# Altium PCB PCB1.PcbDoc
Units mm, origin at the board's own origin, x right, y up, seen from the top; angles counter-clockwise.
Board outline 100.55 x 100 mm, 2 copper layers (Top Layer, Bottom Layer); 36 components, 15 nets, 102 pads, 5 vias.
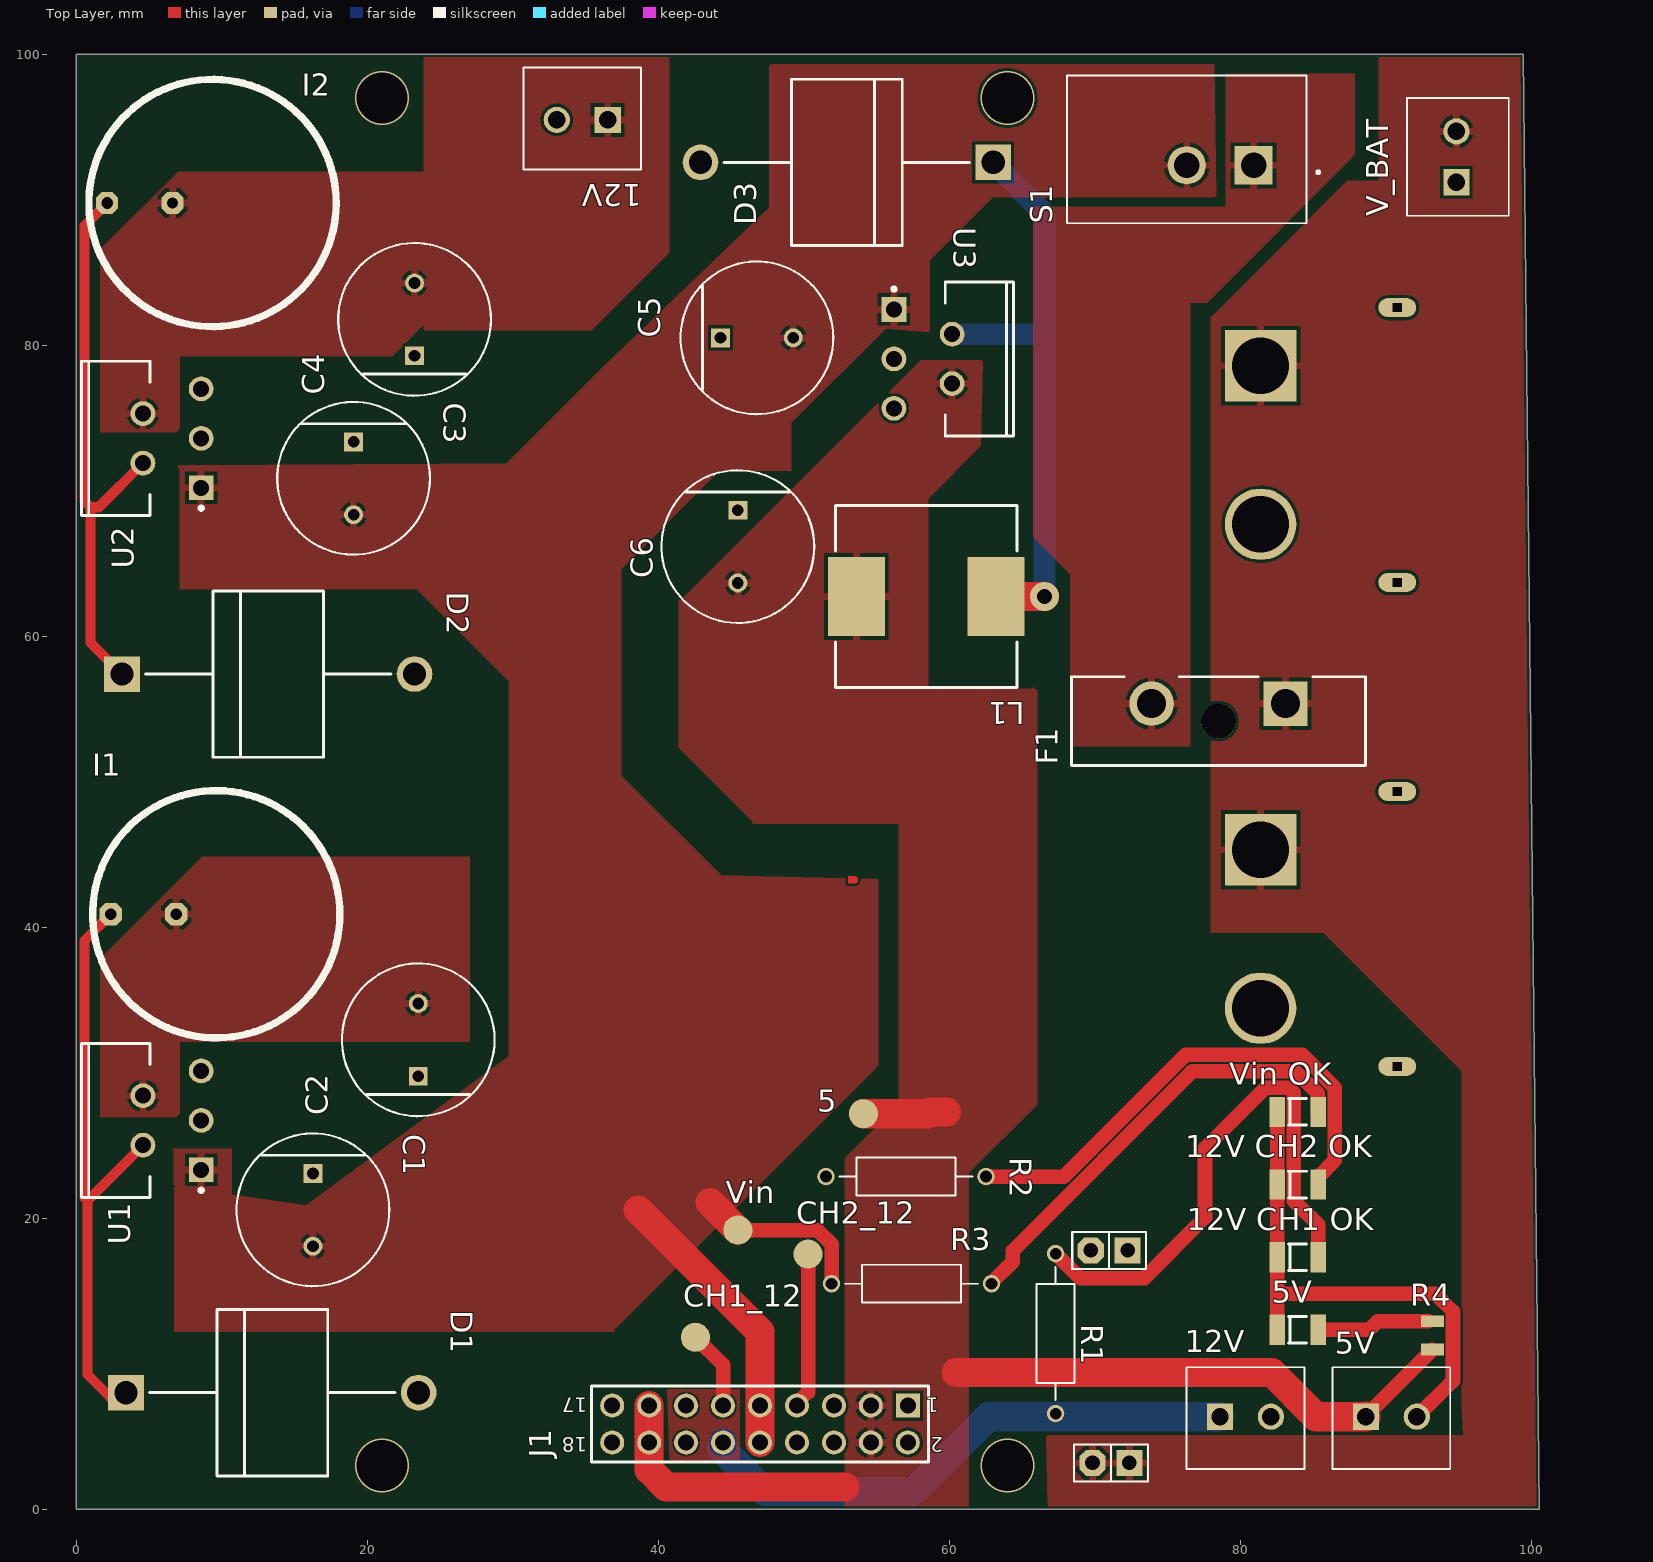
[diagram p0: Top Layer view]
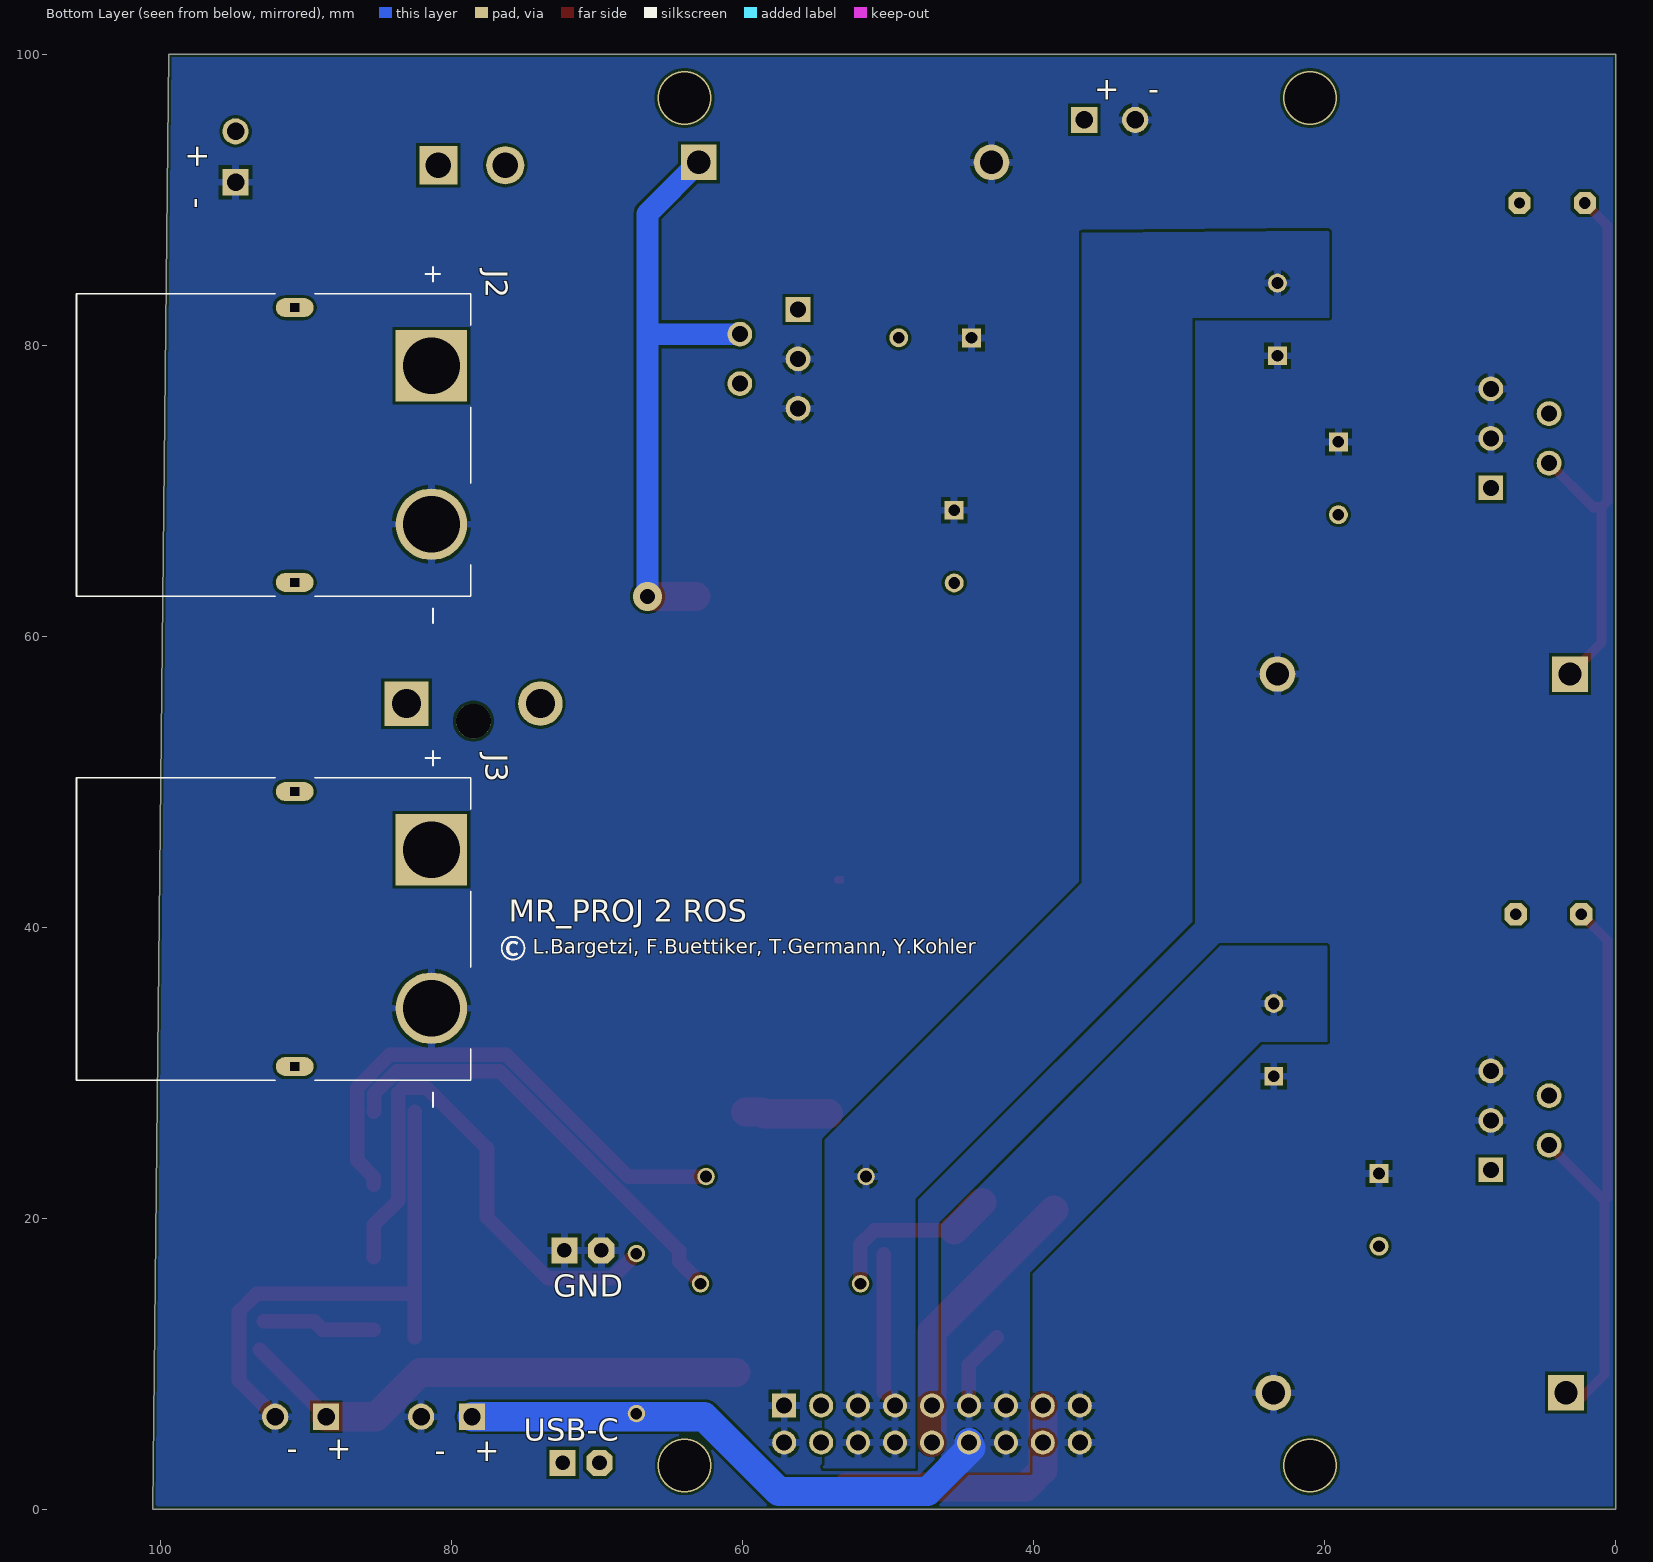
[diagram p1: Bottom Layer view, seen from below]
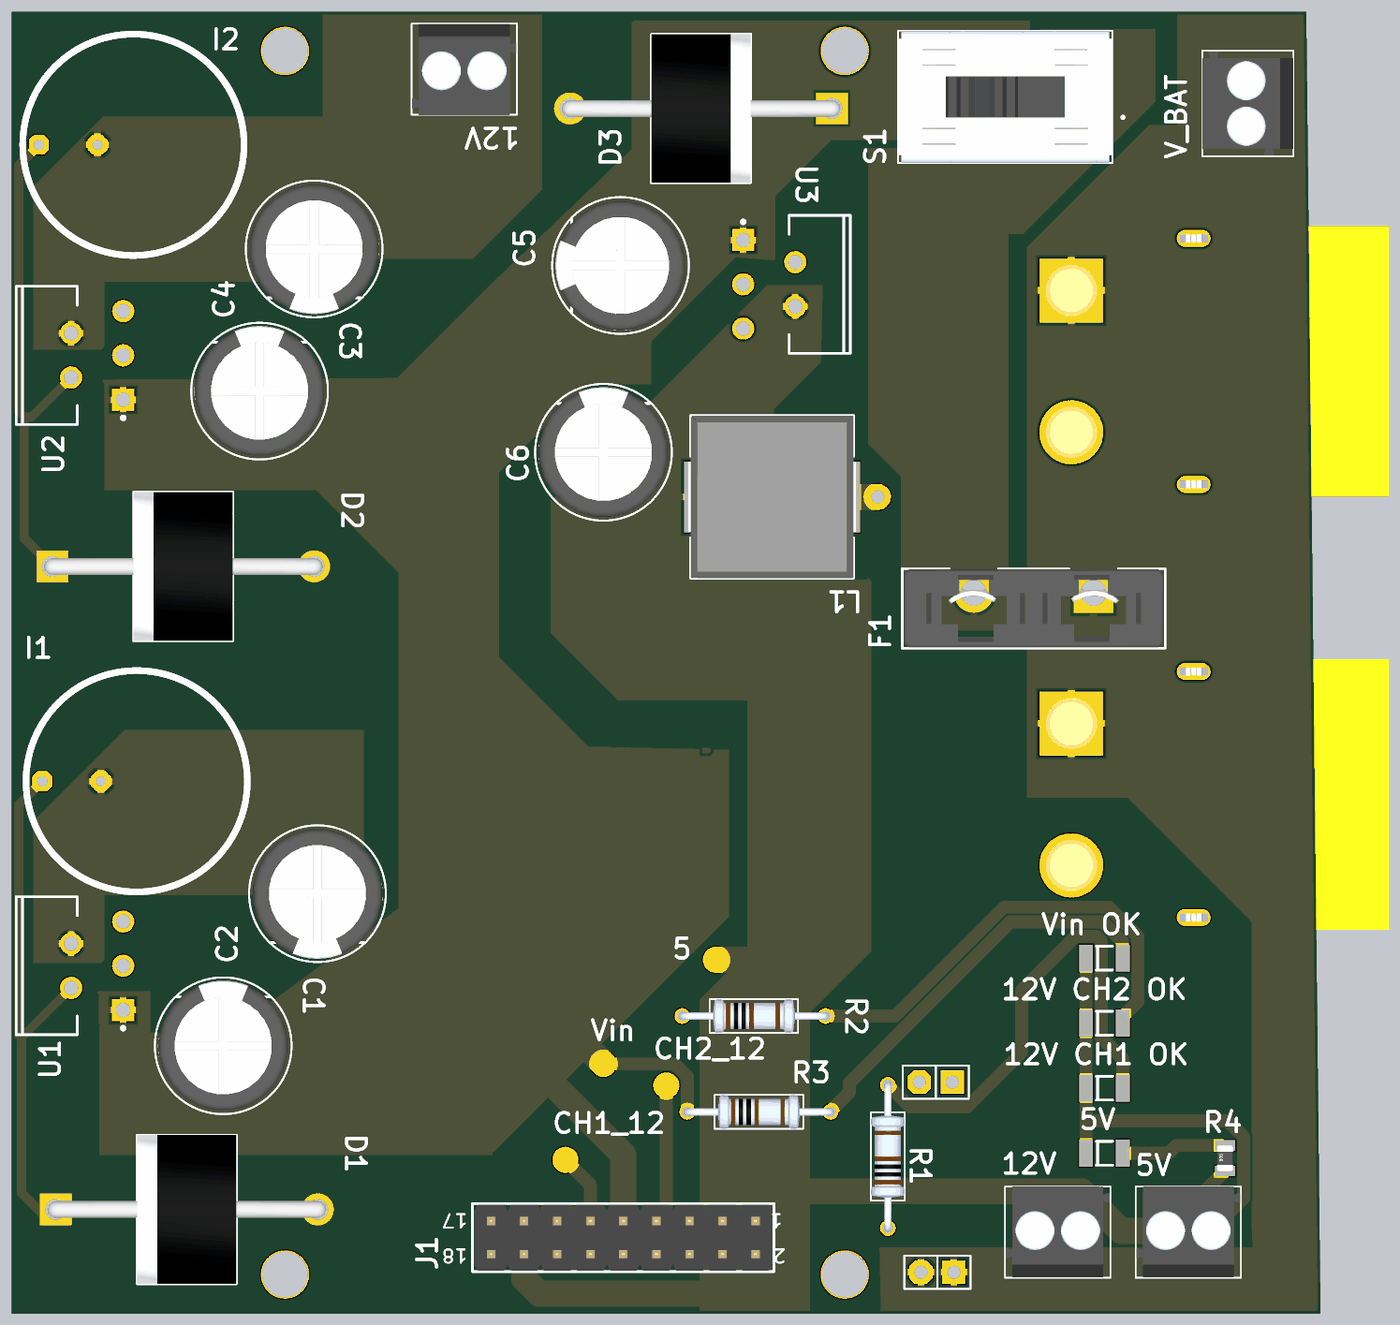
[diagram p2: 3D render of the assembled board from above, using the file's embedded part models]

## Layer stack, top to bottom
Top Solder: solder mask 0.0102, Solder Resist, Dk 3.5
Top Layer: signal copper 0.0356
Dielectric 1: dielectric 0.32, FR-4, Dk 4.8
Bottom Layer: signal copper 0.0356
Bottom Solder: solder mask 0.0102, Solder Resist, Dk 3.5

## Board outline
0,0 0,100 99.455,100 100.546,0 66.548,0

## Design rules (kind name [scope] priority, off if disabled: settings)
BoardOutlineClearance [All] p1: gap=0.2 ignorepadtopadclearanceinfootprint=FALSE except(0.4: Arc-SplitBarrior Arc-SplitContinuation Track-SplitBarrior Track-SplitContinuation SMDPad-SplitBarrior SMDPad-SplitContinuation THPad-SplitBarrior THPad-SplitContinuation Via-SplitBarrior Via-SplitContinuation Fill-SplitBarrior Fill-SplitContinuation Poly-SplitBarrior Poly-SplitContinuation Region-SplitBarrior Region-SplitContinuation Text-SplitBarrior Text-SplitContinuation)
Clearance "Clearance Bottom Layer" [OnLayer('Bottom Layer')] p1: gap=0.2 ignorepadtopadclearanceinfootprint=TRUE except(0.089: Arc-Arc Arc-Track Arc-SMDPad Track-Track Track-SMDPad SMDPad-SMDPad; 0.127: Arc-Via Track-Via SMDPad-Via THPad-Via Via-Via; 0.254: Arc-Text Track-Text SMDPad-Text THPad-Text Via-Text Fill-Text Poly-Text Region-Text Text-Text)
Clearance "Clearance Top Layer" [OnLayer('Top Layer')] p2: gap=0.2 ignorepadtopadclearanceinfootprint=TRUE except(0.089: Arc-Arc Arc-Track Arc-SMDPad Track-Track Track-SMDPad SMDPad-SMDPad; 0.127: Arc-Via Track-Via SMDPad-Via THPad-Via Via-Via; 0.254: Arc-Text Track-Text SMDPad-Text THPad-Text Via-Text Fill-Text Poly-Text Region-Text Text-Text)
Clearance [All] p3: gap=0.2 ignorepadtopadclearanceinfootprint=FALSE except(0.089: Arc-Arc Arc-Track Arc-SMDPad Track-Track Track-SMDPad SMDPad-SMDPad; 0.127: Arc-Via Track-Via SMDPad-Via THPad-Via Via-Via; 0.254: Arc-Text Track-Text SMDPad-Text THPad-Text Via-Text Fill-Text Poly-Text Region-Text Text-Text)
HoleSize [All] p1: absolutevalues=TRUE maxlimit=6.3 minlimit=0.2 maxpercent=80.000 minpercent=20.000
MinimumAnnularRing [All] p1: minimumring=0.076
MinimumSolderMaskSliver [All] p1: minsoldermaskwidth=0.1
PolygonConnect PolygonConnect_1 [All] p1: thpad.connectstyle=Relief thpad.reliefconductorwidth=0.508 thpad.reliefentries=4 thpad.polygonreliefangle="90 Angle" thpad.airgapwidth=0.254 smdpad.connectstyle=Relief smdpad.reliefconductorwidth=0.508 smdpad.reliefentries=4 smdpad.polygonreliefangle="90 Angle" smdpad.airgapwidth=0.254 via.connectstyle=Direct via.reliefconductorwidth=0.508 via.reliefentries=4 via.polygonreliefangle="90 Angle" via.airgapwidth=0.254
RoutingCorners [All] p1: cornerstyle=Round minsetback=2.54 maxsetback=2.54
RoutingVias [All] p1: holewidth=0.5 width=1 viastyle="Through Hole" minholewidth=0.2 minwidth=0.45 maxholewidth=1 maxwidth=2
SilkToSilkClearance [All] p1: silktosilkclearance=0.1
SilkToSolderMaskClearance [IsPad] p1: minsilkscreentomaskgap=0.1 clearancetoexposedcopper=TRUE
SolderMaskExpansion [All] p1: expansion=0.102 istentingtop=FALSE
Width [All] p1: maxlimit=2.54 minlimit=0.089 preferedwidth=0.381
25 further rules are at their usual default settings.

## Classes and differential pairs
component class Sheet1: 5 5V 12V "12V CH2 OK" C1 C2 C3 C4 C5 C6 CH1_12 CH2_12 D1 D2 D3 F1 I1 I2 J1 J2 J3 L1 R1 R2 R3 S1 U1 U2 U3 V_BAT "Vin OK"

## Components (designator, comment, footprint, x,y, rotation, side; value= is the part's Value field where it differs from the comment)
5 "MP" MP_20 54.102,27.178 r90 top
5V "LED GREEN" LED_1206 83.947,12.319 r0 top (schematic designator D7)
5V "2Pin_Female" OSTTE020104 90.396,6.35 r0 top
12V "2Pin_Female" OSTTE020104 34.77,95.504 r180 top
12V "2Pin_Female" OSTTE020104 80.363,6.35 r0 top (schematic designator 1)
"12V CH1 OK" "LED GREEN" LED_1206 83.947,17.314 r0 top (schematic designator D4)
"12V CH2 OK" "LED GREEN" LED_1206 83.947,22.31 r0 top (schematic designator D5)
C1 "EEUFS1H331" FP-RAD-TH-D_10_0_5-L_20_2-MFG 16.256,20.574 r270 top
C2 "EEUFS1H331" FP-RAD-TH-D_10_0_5-L_20_2-MFG 23.495,32.258 r90 top
C3 "EEUFS1H331" FP-RAD-TH-D_10_0_5-L_20_2-MFG 19.05,70.866 r270 top
C4 "EEUFS1H331" FP-RAD-TH-D_10_0_5-L_20_2-MFG 23.241,81.788 r90 top
C5 "EEUFS1H331" FP-RAD-TH-D_10_0_5-L_20_2-MFG 46.776,80.518 r0 top
C6 "EEUFS1H331" FP-RAD-TH-D_10_0_5-L_20_2-MFG 45.466,66.167 r270 top
CH1_12 "MP" MP_20 42.545,11.811 r90 top
CH2_12 "MP" MP_20 50.292,17.526 r90 top
D1 "1N5825" Microsemi_1N5825_0 13.462,8.001 r0 top
D2 "1N5825" Microsemi_1N5825_0 13.183,57.404 r0 top
D3 "1N5825" Microsemi_1N5825_0 52.959,92.583 r180 top
F1 "178.6164.0001" FP-178_6164_0001-MFG 78.514,54.172 r180 top
I1 "68uH" PCBComponent_1 2.358,40.894 r0 top
I2 "68uH" PCBComponent_1 2.104,89.789 r0 top
J1 "61301821121" 61301821121 46.99,5.842 r180 top
J2 "XT90PW-M" AMASS_XT90PW-M 90.805,73.152 r270 bottom
J3 "XT90PW-M" AMASS_XT90PW-M 90.805,39.878 r270 bottom
L1 "47uH_Inductor" INDM120120X100N 58.42,62.738 r180 top
R1 "330ohm Normalo" RESAD1100W55L680D260 67.31,12.065 r90 top
R2 "330ohm Normalo" RESAD1100W55L680D260 57.023,22.86 r0 top
R3 "MF1W±2% 600R PB" RESAD1100W55L680D260 57.404,15.494 r0 top
R4 "R 120R 0805" 0805 93.218,11.938 r90 top value=120R
S1 "Slide Switch" SW_GF_123_0054 76.327,93.472 r180 top
U1 "LM2596T-12/NOPB" NDH0005A 6.572,26.719 r90 top
U2 "LM2596T-12/NOPB" NDH0005A 6.572,73.611 r90 top
U3 "LM2596T-5.0/NOPB" NDH0005A 58.198,79.072 r270 top
V_BAT "2Pin_Female" OSTTE020104 94.869,92.964 r90 top
Vin "MP" MP_20 45.466,19.177 r0 top
"Vin OK" "LED GREEN" LED_1206 83.947,27.305 r0 top (schematic designator D6)

## Footprints (in the part's own frame and the unit in brackets; to place one, negate y for a bottom-side part, rotate by r counter-clockwise, add the part's x,y. Pads: shape width x height; smd on the part's side, far side on the other; paste and mask are expansions set on the pad)
0805 [mil]
  rect 32x62 smd: 1(-38.5,0) 2(38.5,0)
  body extent -39,-25 39,25, height 31
61301821121 [mm] "Pin Header, pitch 2.54 mm, THT, Vertical, dual row, 18p"
  rect 1.65x1.65 hole 1.1: 1(-10.16,-1.27)
  round 1.65 hole 1.1: 2(-10.16,1.27) 3(-7.62,-1.27) 4(-7.62,1.27) 5(-5.08,-1.27) 6(-5.08,1.27) 7(-2.54,-1.27) 8(-2.54,1.27) 9(0,-1.27) 10(0,1.27) 11(2.54,-1.27) 12(2.54,1.27) 13(5.08,-1.27) 14(5.08,1.27) 15(7.62,-1.27) 16(7.62,1.27) 17(10.16,-1.27) 18(10.16,1.27)
  silkscreen extent -11.58,-2.62 11.58,2.62, body extent -11.43,-2.54 11.43,2.54, height 8.59
AMASS_XT90PW-M [mm]
  round 4.916 hole 3.9: N(5.45,9.4)
  rect 4.916x4.916 hole 3.9: P(-5.45,9.4)
  oval 1.3x2.6 hole 0.6 square: S1(-9.45,0) S2(9.45,0)
  silkscreen extent -12.25,-15 12.25,12.1, body extent -10.6,-15 10.6,12.1, height 10.3
FP-178_6164_0001-MFG [mm]
  rect 3.05x3.05 hole 2 paste-1000 mask+0: 1(-4.6,-1.2)
  round 3.05 hole 2 paste-1000 mask+0: 2(4.6,-1.2)
  round 2.4 hole 2.4 unplated paste-1000 mask+0: ""(0,0)
  silkscreen extent -10.1,-3.05 10.1,3.05, body extent -10.2,-3.15 10.2,3.15, height 0.25
FP-RAD-TH-D_10_0_5-L_20_2-MFG [mm]
  rect 1.3x1.3 hole 0.8 paste-1000 mask+0: 1(-2.5,0)
  round 1.3 hole 0.8 paste-1000 mask+0: 2(2.5,0)
  silkscreen extent -5.25,-5.25 5.25,5.25, body extent -5.35,-5.35 5.35,5.35, height 0.25
INDM120120X100N [mm] "Molded Inductor, 2-Leads, Body 12.00x12.00mm, IPC Medium Density"
  rect 3.9x5.45 smd: 1(-4.8,0) 2(4.8,0)
  silkscreen extent -6.25,-6.25 6.25,6.25, body extent -6.47,-6.25 6.47,6.25, height 10
LED_1206 [mil]
  rect 42x82 smd: A(55.5,0) K(-55.5,0)
  silkscreen extent -24,-36 24,36, body extent -62,-32 64,31, height 43
Microsemi_1N5825_0 [mm]
  rect 2.45x2.45 hole 1.6 paste-1000 mask+0: 1(-10.058,0)
  round 2.45 hole 1.6 paste-1000 mask+0: 2(10.058,0)
  silkscreen extent -8.43,-5.71 8.43,5.71, body extent -11.38,-5.81 11.38,5.81, height 0.25
MP_20 [mm]
  round 2 smd paste-1: 1(0,0)
  body extent -0.99,-1 1,1, height 0
NDH0005A [mm] "FM, 5-Leads, Body 10.6x4.7mm, Pitch 1.7mm"
  rect 1.7x1.7 hole 1.1: 1(-3.4,-2)
  round 1.7 hole 1.1: 2(-1.7,2) 3(0,-2) 4(1.7,2) 5(3.4,-2)
  silkscreen extent -5.3,-2.13 5.3,6.23, body extent -5.35,-2.31 5.35,6.28, height 21.1
OSTTE020104 [mm] "2 Pin Schraub-Klemmleiste"
  rect 1.8x1.8 hole 1.2: 1(-1.75,0)
  round 1.8 hole 1.2: 2(1.75,0)
  silkscreen extent -4.05,-3.6 4.05,3.4, body extent -4,-3.57 4,3.43, height 8.4
PCBComponent_1 [mil]
  oct 60x60 hole 31.5: 4(0,0)
  oct 60x60 hole 30: 5(177.17,0)
  silkscreen extent -49,-335 620,335
RESAD1100W55L680D260 [mm]
  round 1.2 hole 0.8: 1(-5.5,0) 2(5.5,0)
  silkscreen extent -4.58,-1.3 4.58,1.3, body extent -5.77,-1.3 5.77,1.3, height 2.6
SW_GF_123_0054 [mm]
  rect 2.625x2.625 hole 1.75: 1(-4.6,1.09)
  round 2.625 hole 1.75: 2(0,1.09)
  silkscreen extent -9.14,-5.08 8.23,5.08, body extent -8.23,-5.08 8.23,5.08, height 14.96

## Part data
5 CH1_12 CH2_12 Vin: library part Measurement_Pad, Part ID=Measurement_Pad
5V "12V CH1 OK" "12V CH2 OK" "Vin OK": library part LED_GREEN_1206, Supplier Part Number 1=67-1357-1-ND, ComponentLink1Description=Datasheet, ComponentLink1URL=https://media.digikey.com/pdf/Data%20Sheets/Lite-On%20PDFs/LTST-C230KGKT.pdf, Part ID=LED_GREEN_1206, Peak Wavelenght=565nm, Price 10pcs=0.226, Supplier 1=Digi-Key
5V 12V 12V V_BAT: library part Terminal_2Pin, Supplier Part Number 1=ED2740-ND, ComponentLink1Description=Datasheet, ComponentLink1URL=https://www.on-shore.com/wp-content/uploads/OSTTEXX0104.pdf, Part ID=Terminal_2Pin, Price 1pc (CHF)=0.69, Supplier 1=Digi-Key
C1 C2 C3 C4 C5 C6: library part CMP-05427-000839-1, "Aluminum Electrolytic Capacitors (Radial Lead Type) 330uF ±20% 50V", RoHS Compliant=Yes
F1: library part CMP-08604-000013-1, "FUSE HOLDER BLADE 80V PCB", Manufacturer="Littelfuse Inc", Package=0, Temperature="to +130°C", Temperature Range High=+130°C, Voltage Rating Ac=80V, Automotive=No, Category=Fuse, ComponentLink2Description=Datasheet, ComponentLink2URL=https://www.littelfuse.com/~/media/commercial-vehicle/datasheets/automotive-fuse-holders/ato/littelfuse-fuse-holder-ato-flr-pcb-datasheet.pdf, Conn Orientation=Vertical, Device Class L1="Circuit Protection", Device Class L2="Fuse Holders", Device Class L3=unset, Digikey Description="FUSE HOLDER BLADE 80V PCB", Height=17.5mm, Lead Free=Yes, Manufacturer Part Number=178.6164.0001, Mouser Description="Fuse Holder HOLDER FOR FLR (ATO) PCB 1-PIN", Number Of Fuses=1, Octopart=https://octopart.com/178.6164.0001-littelfuse-44502275, RoHS=TRUE, Voltage Rating Dc=80V
I1 I2: library part Component_1
J1: library part CMP-1502-01101-1, "THT Vertical Pin Header WR-PHD, Pitch 2.54 mm, Dual Row, 18 pins", Contact Resistance=20mOhm, Manufacturer="Wurth Elektronik", Operating Temperature=-40to105degC, Rated Current=3A, Withstanding Voltage=500VAC, Working Voltage=250VAC, Datasheet URL=https://katalog.we-online.de/em/datasheet/6130xx21121.pdf, Gender=Male, Manufacturer URL=http://www.we-online.de, Mounting Technology=THT, Orientation=Vertical, Package Reference=61301821121, Packaging=Bag, Part Number=61301821121, Pin Number=18, Pitch=2.54mm, Publisher=WurthElektronik, Row Number=Dual
J2 J3: "Socket; DC supply; XT90; male; PIN: 2; on PCBs; THT; Colour: yellow", Package=Package, Availability="Not in stock", Check_prices=https://www.snapeda.com/parts/XT90PW-M/AMASS/view-part/?ref=eda, MF=AMASS, MP=XT90PW-M, Price=None, SnapEDA_Link=https://www.snapeda.com/parts/XT90PW-M/AMASS/view-part/?ref=snap
L1: library part YPRH1209_47uH_Inductor, "Inductor 47uH"
R1 R2 R3: library part MFR-25FBF52-1K, "1.07 kOhms Â±1% 0.25W, 1/4W Through Hole Resistor Axial - Metal Film", Package="Axial Yageo", Availability="In Stock", Check_prices=https://www.snapeda.com/parts/MFR-25FBF52-1K/Yageo/view-part/?ref=eda, MF=Yageo, MP=MFR-25FBF52-1K, Price=None, Purchase-URL=https://pricing.snapeda.com/search/part/MFR-25FBF52-1K/?ref=eda, SnapEDA_Link=https://www.snapeda.com/parts/MFR-25FBF52-1K/Yageo/view-part/?ref=snap
R4: library part R_120R_0805, Power Dissipation=125mW, Supplier Part Number 1=A129738CT-ND, Tolerance=1%, Part ID=R_120R_0805, Price 10pcs (CHF)=0.046, Supplier 1=Digi-Key
S1: library part Slide_Switch, Current=8.5A, Supplier Part Number 1=CWI333-ND, Voltage=125V, ComponentLink1Description=Datasheet, ComponentLink1URL=https://media.digikey.com/pdf/Data%20Sheets/CW%20Industries%20PDFs/GF-123-0054_Dwg.pdf, Dimension=10mmx16.5mmx8.8mm, Part ID=Slide_Switch, Price 1pc (CHF)=1.17, Supplier 1=Digi-Key
U1 U2: library part CMP-0069-01925-3, "SIMPLE SWITCHER® Power Converter 150 KHz 3A Step-Down Voltage Regulator, 5-pin TO-220, Pb-Free", Manufacturer="Texas Instruments", PackageTopMarking="NSUZXYTTE#*LM2596T*-12 P+", PowerWise=N, ComponentLink1Description="Datasheet URL", ComponentLink1URL=http://www.ti.com/general/docs/lit/getliterature.tsp?genericPartNumber=LM2596&fileType=pdf, CompType=Switcher, PackageDescription="TO-220, Molded, Stagger Bend, 5 Lead", PackageReference=NDH0005A, PinCount=5, RoHS=Y
U3: library part CMP-0069-01926-3, "SIMPLE SWITCHER® Power Converter 150 KHz 3A Step-Down Voltage Regulator, 5-pin TO-220, Pb-Free", Manufacturer="Texas Instruments", PackageTopMarking="NSUZXYTTE#*LM2596T*-5.0 P+", PowerWise=N, ComponentLink1Description="Datasheet URL", ComponentLink1URL=http://www.ti.com/general/docs/lit/getliterature.tsp?genericPartNumber=LM2596&fileType=pdf, CompType=Switcher, PackageDescription="TO-220, Molded, Stagger Bend, 5 Lead", PackageReference=NDH0005A, PinCount=5, RoHS=Y

## Free pads (board coordinates)
  rect 1.8x1.8 hole 1: 1(72.263,17.78) 1(72.39,3.175)
  oct 1.8x1.8 hole 1: 2(69.723,17.78) 2(69.85,3.175)

## Via types
v1: diameter 3.7, hole 3.5, Top Layer to Bottom Layer, 4 vias
v2: diameter 2, hole 1, Top Layer to Bottom Layer, 1 vias

## Nets (pads, with @x,y where several pads share a name; then routed paths per layer and width w, separated by ;. In a path a pad name is that pad's centre, name@x,y a point inside that pad or via, vN(x,y) a via of type N, cw(c..) or ccw(c..) an arc to the next point about the centre after c; other vN are vias at no path point)
5v: 
5VDC: 5.1 5V.1 C6.2 J1.3 J1.4 J1.15 J1.16 L1.2 R4.1 U3.4 | length 60.1
  Top Layer w1: 5V.1@88.646,6.388 R4.1
  Top Layer w2: J1.15 39.37,2.696 40.542,1.524 52.832,1.524 ; 5.1 58.547,27.178 58.674,27.305 59.817,27.305 ; 60.452,9.398 82.169,9.398 85.217,6.35 5V.1 5V.1@88.646,6.388
12VDC_CH1: 12V.1@78.613,6.35 C2.2 CH1_12.1 I1.5 J1.11 J1.12 J1.13 J1.14 R1.1 U1.4 | length 43.4
  Top Layer w1: CH1_12.1 44.45,9.906 J1.11
  Bottom Layer w2: J1.12@44.306,4.208 47.314,1.2 57.507,1.2 62.657,6.35 65.786,6.35 67.564,6.35 12V.1@78.613,6.35 ; J1.12@44.45,4.351 J1.12
12VDC_CH2: 12V.1@36.52,95.504 C4.2 CH2_12.1 I2.5 J1.5 J1.6 J1.7 J1.8 R2.1 U2.4 | length 10.7
  Top Layer w1: J1.7 49.53,7.288 50.292,8.05 CH2_12.1
GND: 5V.2 5V.K 12V.2 "12V CH1 OK.K" "12V CH2 OK.K" "Vin OK.K" C1.1 C2.1 C3.1 C4.1 C5.1 C6.1 D1.2 D2.2 D3.2 J1.1 J1.2 J1.17 J1.18 J2.N J3.N pad.1@72.263,17.78 pad.2@69.723,17.78 U1.3 U1.5 U2.3 U2.5 U3.3 U3.5 V_BAT.1 | length 36.4
  Top Layer w1: 5V.K@82.537,11.811 5V.K 82.537,14.817 ; 82.537,27.305 82.537,22.31 82.537,17.314 82.537,14.817 ; 5V.2 94.632,8.836 94.632,13.582 93.398,14.817 82.537,14.817
NetD1_1: D1.1 I1.4 U1.2 | length 41.6
  Top Layer w0.7: D1.1@2.358,7.65 2.134,7.874 ; I1.4 0.55,39.086 0.55,21.407 0.755,21.202 ; D1.1@3.556,7.874 2.134,7.874 ; U1.2 0.755,21.202 ; 0.755,21.202 0.755,9.253 2.134,7.874
NetD2_1: D2.1 I2.4 U2.2 | length 39
  Top Layer w0.7: I2.4 0.55,88.235 0.55,69.289 0.96,68.879 ; D2.1 0.96,59.569 0.96,68.879 ; U2.2 1.54,68.879 0.96,68.879
NetD3_1: D3.1 L1.1 U3.2 | length 41.3
  Top Layer w0.7: D3.1 D3.1@63.22,92.38
  Top Layer w2: L1.1 v2(66.548,62.738)
  Bottom Layer w1.5: U3.2 66.421,80.772 66.548,80.645 ; D3.1 66.548,89.052 66.548,80.645 ; v2(66.548,62.738) 66.548,80.645
NetD4_A: "12V CH1 OK.A" R1.2 | length 37.4
  Top Layer w1: R1.2 69,15.875 73.406,15.875 77.583,20.052 77.583,24.813 81.744,28.973 83.33,28.973 83.698,28.606 83.698,21.209 85.357,19.55 85.357,17.314
NetD5_A: "12V CH2 OK.A" R2.2 | length 35.5
  Top Layer w1: R2.2 67.879,22.86 76.246,31.227 84.264,31.227 86.517,28.974 86.517,23.978 85.357,22.818 85.357,22.31
NetD6_A: "Vin OK.A" R3.2 | length 30.9
  Top Layer w1: R3.2 62.904,15.548 64.356,17.001 64.356,17.744 76.713,30.1 83.797,30.1 85.323,28.574 85.323,27.338 85.357,27.305
NetD7_A: 5V.A R4.2 | length 7.8
  Top Layer w1: 5V.A 88.862,12.319 89.459,12.916 R4.2@92.931,12.916
NetF1_1: F1.1 J2.P J3.P pad.1@72.39,3.175 pad.2@69.85,3.175 V_BAT.2
NetF1_2: F1.2 S1.1
Vin: C1.2 C3.2 C5.2 J1.9 J1.10 R3.1 S1.2 U1.1 U2.1 U3.1 Vin.1 | length 31.7
  Top Layer w1: Vin.1 50.942,19.177 51.919,18.2 51.919,15.509 R3.1
  Top Layer w2: 38.608,20.574 46.99,12.192 J1.9 J1.10 ; 43.561,21.082 Vin.1
pads on no net: F1. J2.S1 J2.S2 J3.S1 J3.S2
copper on no net:
  other v1: 21,3 64,3 21,97 64,97

## Polygon pours and split planes (outlines as drawn)
NetF1_1 on Top Layer "NONET_L-01_P-001" (solid, remove dead copper, pour order 21): 89.662,100.838 89.535,100.711 89.535,91.313 87.376,91.313 81.661,85.598 102.235,85.598 102.235,100.584 102.87,101.219
NetF1_1 on Top Layer "NONET_L-01_P-001" (solid, remove dead copper, pour order 20): 66.675,-1.524 66.802,-1.397 66.666,5.08 95.323,5.08 95.25,6.985 95.25,30.099 84.455,40.894 86.106,42.545 101.6,42.545 101.6,0.381 103.886,-1.905
Vin on Top Layer "VIN_L01_P011" (solid, remove dead copper, pour order 11): 37.052,12.414 55.118,30.48 55.118,43.324 44.323,43.561 37.465,50.419 37.465,66.167 20.447,66.167 29.718,56.896 29.718,31.141 12.573,18.542
5VDC on Top Layer "5VDC_L01_P017" (solid, remove dead copper, pour order 17): 56.261,48.387 56.515,48.133 56.515,27.813 52.832,24.13 52.832,0 61.341,0 61.341,23.114 66.04,27.813 66.04,48.387
Vin on Top Layer "VIN_L01_P009" (solid, remove dead copper, pour order 9): 58.674,80.899 58.674,85.852 47.625,85.852 51.308,86.614 48.768,90.551 36.195,78.486 27.94,70.231 27.94,63.246 36.068,63.246 44.196,71.374 49.149,71.374 49.149,74.676 55.626,81.153
Vin on Top Layer "VIN_L01_P016" (solid, remove dead copper, pour order 16): 78.359,90.17 62.992,90.17 56.642,83.82 47.625,83.82 47.625,99.187 47.752,99.314 78.232,99.314
NetF1_2 on Top Layer "NETF1_2_L01_P015" (solid, remove dead copper, pour order 15): 76.581,52.451 76.581,82.931 77.724,82.931 87.884,93.091 87.884,98.679 78.994,98.679 78.994,98.044 78.994,89.535 65.659,89.535 65.532,89.408 65.786,89.154 65.786,66.802 68.326,64.262 68.326,52.451
NetF1_1 on Top Layer "NETF1_1_L01_P014" (solid, remove dead copper, pour order 14): 82.443,86.38 77.978,81.915 77.978,39.624 103.632,39.624 103.632,86.823 87.503,86.614
12VDC_CH2 on Top Layer "12VDC_CH2_L01_P013" (solid, remove dead copper, pour order 13): 23.876,81.026 23.876,99.822 40.767,99.822 40.767,86.36 35.433,81.026
5VDC on Top Layer "5VDC_L01_P012" (solid, remove dead copper, pour order 12): 62.315,78.994 58.039,78.994 41.529,62.484 41.402,62.484 41.402,52.324 46.482,47.244 46.482,47.117 56.642,47.117 66.04,47.117 66.04,56.261 65.786,56.515 65.659,56.388 58.547,56.388 58.547,69.469 62.174,73.096
12VDC_CH1 on Top Layer "12VDC_CH1_L01_P010" (solid, remove dead copper, pour order 10): 40.774,3.179 45.593,3.426 45.593,8.255 40.595,8.255
Vin on Top Layer "VIN_L01_P007" (solid, remove dead copper, pour order 7): 6.858,71.755 7.112,71.501 7.112,63.246 27.94,63.246 31.115,66.421 31.115,71.882
Vin on Top Layer "VIN_L01_P006" (solid, remove dead copper, pour order 6): 6.685,22.249 6.685,24.557 6.477,24.765 10.668,24.765 10.668,21.59 11.43,20.828
Vin on Top Layer "VIN_L01_P005" (solid, remove dead copper, pour order 5): 6.731,22.197 6.731,12.192 36.957,12.192 36.957,17.781
12VDC_CH1 on Top Layer "12VDC_CH1_L01_P003" (solid, remove dead copper, pour order 3): 8.636,44.831 1.651,37.846 1.651,26.924 6.858,26.924 7.112,27.178 7.112,32.131 27.051,32.131 27.051,44.831
12VDC_CH2 on Top Layer "12VDC_CH2_L01_P002" (solid, remove dead copper, pour order 2): 6.985,91.948 1.651,86.614 1.651,74.041 6.858,74.041 7.112,74.295 7.112,79.248 21.717,79.248 26.797,84.328 26.797,91.948
GND on Bottom Layer "NONET_L-01_P-001" (solid, remove dead copper, pour order 22): -4.826,103.632 -5.08,103.378 -5.08,-4.064 104.013,-4.064 105.537,-2.54 105.537,103.886
12VDC_CH2 on Bottom Layer "NONET_L-01_P-001" (solid, remove dead copper, pour order 19): 19.685,87.884 19.685,81.915 29.083,81.915 29.083,40.386 48.133,21.336 48.133,2.794 54.61,2.794 54.356,3.048 54.356,25.4 36.703,43.053 36.703,87.757
12VDC_CH1 on Bottom Layer "NONET_L-01_P-001" (solid, remove dead copper, pour order 18): 19.685,38.735 19.812,38.608 19.812,32.131 24.384,32.131 40.259,16.256 40.259,2.54 45.646,2.54 46.355,3.249 46.355,19.558 27.178,38.735 22.098,38.735

## Other copper
Top Layer:
  region: 53.227,43.488 53.546,43.488 53.546,43.479 53.574,43.479 53.574,43.47 53.593,43.47 53.593,43.46 53.612,43.46 53.612,43.451 53.621,43.451 53.621,43.441 53.631,43.441 53.631,43.432 53.64,43.432 53.64,43.423 53.65,43.423 53.65,43.413 53.659,43.413 53.659,43.404 53.668,43.404 53.668,43.394 53.678,43.394 53.678,43.376 53.687,43.376 53.687,43.357 53.697,43.357 53.697,43.338 53.706,43.338 53.706,43.3 53.715,43.3 53.715,43.225 53.706,43.225 53.706,43.178 53.697,43.178 53.697,43.159 53.687,43.159 53.687,43.141 53.678,43.141 53.678,43.122 53.668,43.122 53.668,43.112 53.659,43.112 53.659,43.103 53.65,43.103 53.65,43.094 53.64,43.094 53.64,43.084 53.631,43.084 53.631,43.075 53.621,43.075 53.621,43.065 53.603,43.065 53.603,43.056 53.593,43.056 53.593,43.047 53.574,43.047 53.574,43.037 53.537,43.037 53.537,43.028 53.048,43.028 53.048,43.488 53.217,43.488

## Silkscreen, mask and mechanical layers (free items; w line width, h text height)
Top Overlay:
  lines w0.15: 70.993,16.51 70.993,19.05 ; 71.12,1.905 71.12,4.445 ; 68.453,16.51 73.533,16.51 73.533,19.05 68.453,19.05 68.453,16.51 ; 68.58,1.905 73.66,1.905 73.66,4.445 68.58,4.445 68.58,1.905
Bottom Overlay:
  drawing of 2 lines, arcs and shapes, not listed
  text "-   +" at 31.369,96.901 h1.52
  text "-   +" at 98.171,89.408 h1.52 r90
  text "MR_PROJ 2 ROS" at 76.073,40.386 h1.52
  text "L.Bargetzi, F.Buettiker, T.Germann, Y.Kohler" at 74.422,38.179 h1
  text "GND" at 73.025,14.605 h1.52
  text "USB-C" at 75.057,4.699 h1.52
  text "+   -" at 86.868,3.429 h1.52
  text "+   -" at 76.708,3.302 h1.52
Mechanical 15:
  lines w0.1: 70.493,17.78 71.493,17.78 ; 70.62,3.175 71.62,3.175 ; 70.993,17.28 70.993,18.28 ; 71.12,2.675 71.12,3.675

## Text inside footprints (layer, text, board x,y; h text height)
J1: Top Overlay "1" at 59.28,7.642 h1.02 r180; Top Overlay "2" at 59.58,4.942 h1.02 r180; Top Overlay "17" at 35.1,7.642 h1.02 r180; Top Overlay "18" at 35.1,4.942 h1.02 r180